# Altium PCB WX0.010.779PCB.pcbdoc
Units mm, origin at the board's own origin, x right, y up, seen from the top; angles counter-clockwise.
Board outline 126.8 x 104.81 mm, 2 copper layers (Top Layer, Bottom Layer); 13 components, 125 nets, 43 pads, 73 vias.
Unrouted connection lines stored in the file: 69.
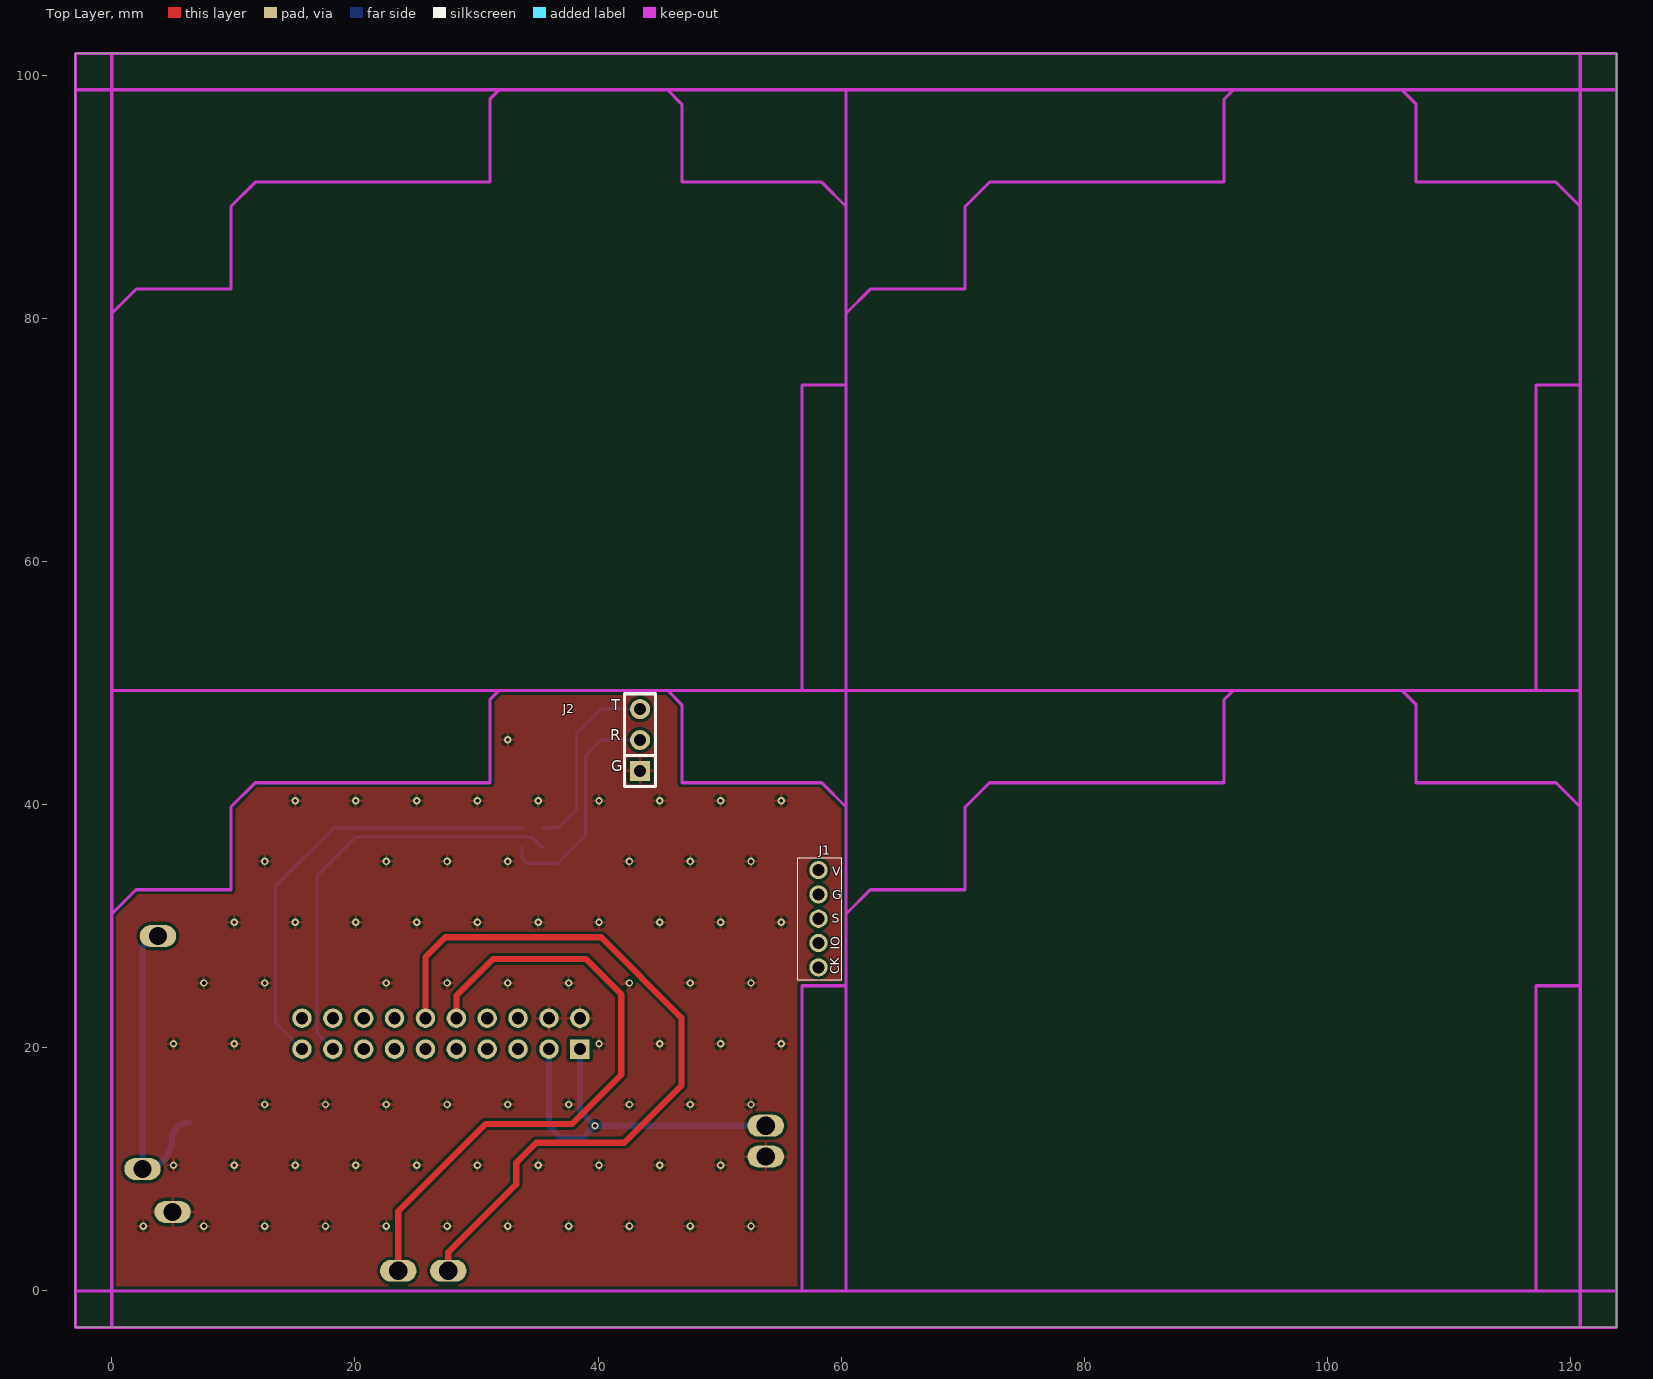
[diagram p0: Top Layer view]
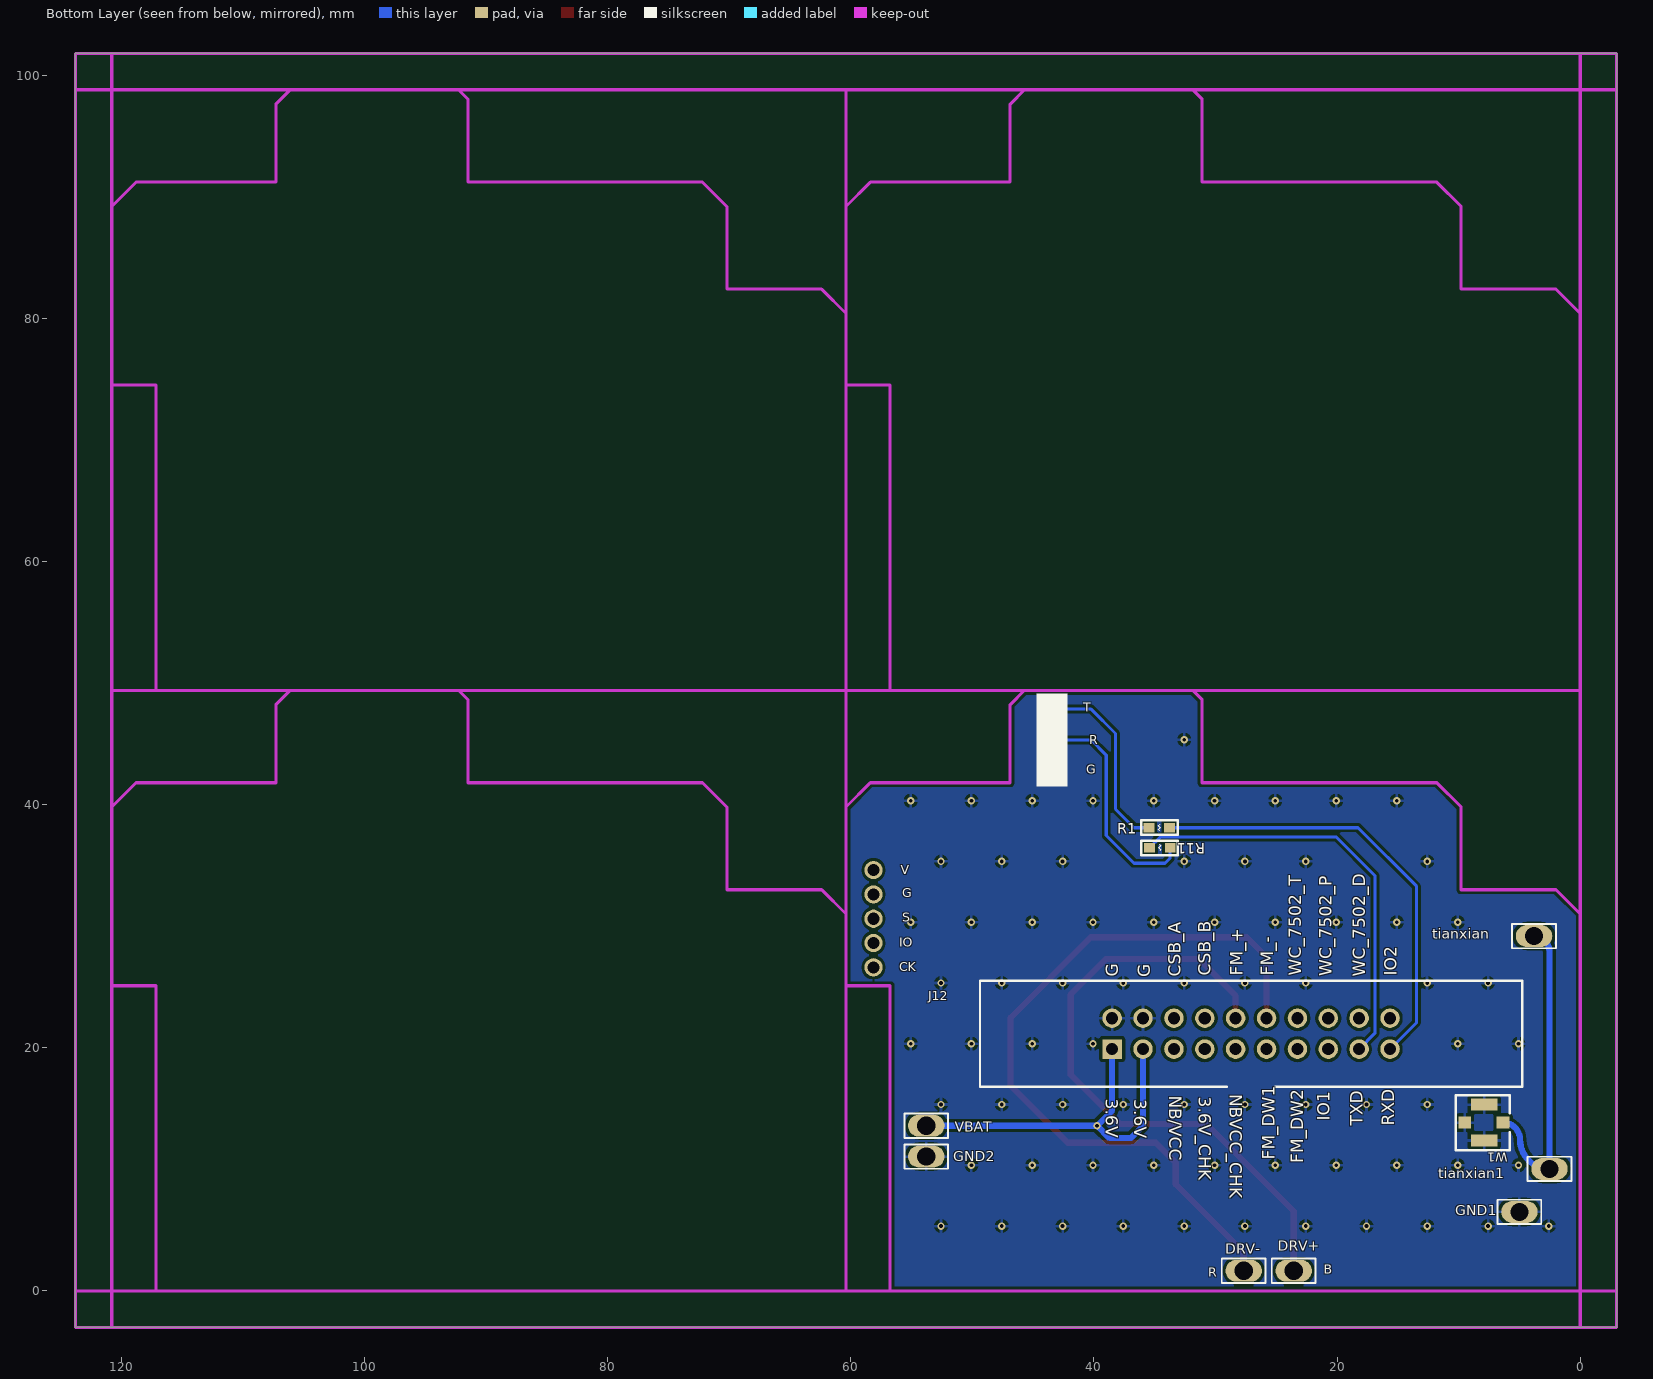
[diagram p1: Bottom Layer view, seen from below]

## Layer stack, top to bottom
Top Solder: solder mask 0.0102, Solder Resist, Dk 3.5
Top Layer: signal copper 0.0356
Dielectric 1: dielectric 0.32, FR-4, Dk 4.8
Bottom Layer: signal copper 0.0356
Bottom Solder: solder mask 0.0102, Solder Resist, Dk 3.5

## Board outline
-3,-3 123.8,-3 123.8,101.806 -3,101.806

## Design rules (kind name [scope] priority, off if disabled: settings)
Clearance [All] p1: gap=0.254 ignorepadtopadclearanceinfootprint=FALSE except(0: Arc-Hole Track-Hole SMDPad-Hole THPad-Hole Via-Hole Fill-Hole Poly-Hole Region-Hole Text-Hole)
PolygonConnect [All] p1: connectstyle=Relief reliefconductorwidth=0.254 reliefentries=4 polygonreliefangle="90 Angle" airgapwidth=0.254
RoutingVias [All] p1: holewidth=0.711 width=1.27 viastyle="Through Hole" minholewidth=0.711 minwidth=1.27 maxholewidth=0.711 maxwidth=1.27
SilkToSilkClearance [All] p1: silktosilkclearance=0
SilkToSolderMaskClearance [IsPad] p1 off: minsilkscreentomaskgap=0.254 clearancetoexposedcopper=TRUE
SolderMaskExpansion [All] p1: expansion=0.102
Width [All] p1: maxlimit=0.508 minlimit=0.254 preferedwidth=0.254 minimp=50.000000 maximp=50.000000 favimp=50.000000
28 further rules are at their usual default settings.

## Components (designator, comment, footprint, x,y, rotation, side; value= is the part's Value field where it differs from the comment)
DRV+ "Test Point" TP5 23.571,1.651 r270 bottom (schematic designator TP1)
DRV- "Test Point" TP5 27.686,1.651 r270 bottom (schematic designator TP1)
GND1 "Test Point" TP5 5.004,6.496 r270 bottom (schematic designator TP1)
GND2 "Test Point" TP5 53.797,11.049 r90 bottom (schematic designator TP1)
J1 "CON5-2.0" J_DIP_2.0_1*05_H 58.141,34.614 r270 top
J2 "CON3" SIP-3 43.459,42.774 r90 top
J12 "DC254_2*10" DC254_2*10 27.076,21.158 r90 bottom (schematic designator J2)
R1 "100R 5%" RES0603 33.782,38.1 r0 bottom (schematic designator R104)
R11 "100R 5%" RES0603 35.433,36.449 r180 bottom (schematic designator R104)
tianxian "Test Point" TP5 3.801,29.186 r270 bottom (schematic designator TP1)
tianxian1 "Test Point" TP5 2.527,10.033 r270 bottom (schematic designator TP1)
VBAT "Test Point" TP5 53.797,13.589 r90 bottom (schematic designator TP1)
W1 "天线" ANT-IPEX 6.35,13.843 r90 bottom

## Footprints (in the part's own frame and the unit in brackets; to place one, negate y for a bottom-side part, rotate by r counter-clockwise, add the part's x,y. Pads: shape width x height; smd on the part's side, far side on the other; paste and mask are expansions set on the pad)
ANT-IPEX [mm] "IPX天线座"
  rect 1x1.05 smd: 1(0,0)
  rect 1x2.2 smd: 2(-1.475,1.55) 2(1.475,1.55)
  rect 1x1 smd: 2(0,3.151)
  silkscreen extent -2.26,-0.56 2.26,3.9
DC254_2*10 [mm]
  rect 1.6x1.6 hole 1: 1(-1.27,11.43)
  round 1.6 hole 1: 2(1.27,11.43) 3(-1.27,8.89) 4(1.27,8.89) 5(-1.27,6.35) 6(1.27,6.35) 7(-1.27,3.81) 8(1.27,3.81) 9(-1.27,1.27) 10(1.27,1.27) 11(-1.27,-1.27) 12(1.27,-1.27) 13(-1.27,-3.81) 14(1.27,-3.81) 15(-1.27,-6.35) 16(1.27,-6.35) 17(-1.27,-8.89) 18(1.27,-8.89) 19(-1.27,-11.43) 20(1.27,-11.43)
  silkscreen extent -4.35,-22.3 4.35,22.3
J_DIP_2.0_1*05_H [mm]
  round 1.5 hole 1: 1(0,0) 2(2,0) 3(4,0) 4(6,0) 5(8,0)
  silkscreen extent -1.02,-1.7 9.02,1.91
RES0603 [mil]
  rect 35x31 smd: 1(0,0) 2(67,0)
  silkscreen extent -26,-24 92,23, body extent 0,-15 71,15, height 12
SIP-3 [mil]
  rect 65x65 hole 39.37: 1(0,0)
  round 65 hole 39.37: 2(100,0) 3(200,0)
  silkscreen extent -50,-50 250,50
TP5 [mm]
  oval 1.8x3 hole 1.5: 1(0,0)
  silkscreen extent -1,-1.8 1,1.8

## Part data
DRV+ DRV- GND1 GND2 tianxian tianxian1 VBAT: library part "Test Point  PASS", "测试点"
J1: library part 15, "焊接插座,间距2.0mm"
J2: library part 2, "焊接插座,间距2.54mm"
J12: library part 1010902-0139, "DC2 2.54mm 2x10pin,2.54mm间距，2x10pin，32×8.55×27.5mm,母头,双排,双排"
R1 R11: library part 101010103-0022, "100R,±5%,1/10W,0603,国巨,RC0603JR-07100RL"
W1: library part 1010902-0145, "UB06000058A,3*3.1*1.25mm,公头,单排,IPEX一代板端"

## Via types
v1: diameter 0.61, hole 0.305, Top Layer to Bottom Layer, tented both sides, 72 vias
v2: diameter 0.6, hole 0.3, Top Layer to Bottom Layer, tented both sides, 1 vias

## Nets (pads, with @x,y where several pads share a name; then routed paths per layer and width w, separated by ;. In a path a pad name is that pad's centre, name@x,y a point inside that pad or via, vN(x,y) a via of type N, cw(c..) or ccw(c..) an arc to the next point about the centre after c; other vN are vias at no path point)
AIN8: 
AIN9: 
ANT: 
CLOSE: 
CTR_F_VCC: 
DB_RXD: J2.2 R11.2 | length 18.8
  Bottom Layer w0.254: R11.2 33.731,35.611 34.163,35.179 36.703,35.179 38.989,37.465 38.989,44.069 40.234,45.314 J2.2
DB_TXD: J2.3 R1.2 | length 15.7
  Bottom Layer w0.254: R1.2 36.703,38.1 38.227,39.624 38.227,45.847 40.234,47.854 J2.3
DRV+: DRV+.1 J12.10 | length 52.4
  Top Layer w0.508: DRV+.1 23.571,6.553 30.734,13.716 37.846,13.716 41.91,17.78 41.91,24.384 38.989,27.305 31.369,27.305 28.346,24.282 J12.10
DRV-: DRV-.1 J12.12 | length 62.5
  Top Layer w0.508: J12.12 25.806,27.457 27.432,29.083 40.259,29.083 46.863,22.479 46.863,16.891 42.164,12.192 34.925,12.192 33.274,10.541 33.274,8.763 27.686,3.175 DRV-.1
EXTI1: 
EXTI2: 
EXTI3: 
EXTI4: 
FLASH_CLK: 
FLASH_CS: 
FLASH_MISO: 
FLASH_MOSI: 
FLASH_VCC: 
FLASH_WP: 
GND: GND1.1 GND2.1 J2.1 J12.2 J12.4 W1.2
  other v1: 2.582,5.329 7.582,5.329 12.582,5.329 17.582,5.329 22.582,5.329 27.582,5.329 32.582,5.329 37.582,5.329 42.582,5.329 47.582,5.329 52.582,5.329 5.082,10.329 10.082,10.329 15.082,10.329 20.082,10.329 25.082,10.329 30.082,10.329 35.082,10.329 40.082,10.329 45.082,10.329 50.082,10.329 12.582,15.329 17.582,15.329 22.582,15.329 27.582,15.329 32.582,15.329 37.582,15.329 42.582,15.329 47.582,15.329 52.582,15.329 5.082,20.329 10.082,20.329 40.082,20.329 45.082,20.329 50.082,20.329 55.082,20.329 7.582,25.329 12.582,25.329 22.582,25.329 27.582,25.329 32.582,25.329 37.582,25.329 42.582,25.329 47.582,25.329 52.582,25.329 10.082,30.329 15.082,30.329 20.082,30.329 25.082,30.329 30.082,30.329 35.082,30.329 40.082,30.329 45.082,30.329 50.082,30.329 55.082,30.329 12.582,35.329 22.582,35.329 27.582,35.329 32.582,35.329 42.582,35.329 47.582,35.329 52.582,35.329 15.082,40.329 20.082,40.329 25.082,40.329 30.082,40.329 35.082,40.329 40.082,40.329 45.082,40.329 50.082,40.329 55.082,40.329 32.582,45.329
IR_EN: 
IR_PWM: 
IR_RX: 
IR_TX: 
KEY: 
LED: 
LED0: 
LED1: 
NB_ON: 
NB_RST: 
NB_RST_MCU: 
NB_RX: 
NB_RX_MCU: 
NB_TX: 
NB_TX_MCU: 
NetC2_2: 
NetC4_2: 
NetC5_2: 
NetC6_1: 
NetC6_2: 
NetC7_1: 
NetC8_2: 
NetC14_2: 
NetC16_2: 
NetC17_1: 
NetC18_2: 
NetC23_2: 
NetC24_1: 
NetC33_2: 
NetD1_2: 
NetD3_1: 
NetD3_2: 
NetD4_1: 
NetD4_2: 
NetD5_1: 
NetD6_2: 
NetE1_1: tianxian1.1 tianxian.1 W1.1 | length 25.9
  Bottom Layer w0.508: tianxian1.1 tianxian1.1@2.54,10.033 ; tianxian.1 ccw(c3.801,27.924) 2.54,27.924 tianxian1.1@2.54,10.033 ; W1.1 ccw(c6.35,12.446) 4.953,12.446 cw(c2.54,12.446) tianxian1.1@2.54,10.033
NetE2_1: 
NetE3_1: 
NetJ1_3: J1.3
NetJ3_2: 
NetJ3_3: 
NetJ3_4: 
NetJ4_4: 
NetJ4_5: 
NetJ5_2: 
NetJ5_3: 
NetJ5_4: 
NetKT1_1: 
NetQ1_1: 
NetQ2_1: 
NetQ2_3: 
NetQ3_1: 
NetQ4_1: 
NetQ4_3: 
NetQ5_1: 
NetQ5_3: 
NetQ6_1: 
NetQ6_3: 
NetQ7_1: 
NetQ9_1: 
NetQ9_3: 
NetQ10_1: 
NetQ10_3: 
NetQ11_1: 
NetQ11_3: 
NetQ12_1: 
NetQ12_3: 
NetQ13_1: 
NetR3_2: 
NetR4_2: 
NetR5_2: 
NetR6_2: 
NetR7_2: 
OPEN: 
OUT_A: 
OUT_B: 
OUT_EN: 
P_CH0: 
P_CH1: 
P_CH2: 
RESET: 
RXD: J12.19 R1.1 | length 36.6
  Bottom Layer w0.254: J12.19 13.462,22.073 13.462,33.274 18.288,38.1 R1.1
STATUS: 
SVS: 
SVS_EN: 
SWCLK: J1.5
SWDIO: J1.4
TXD: J12.17 R11.1 | length 35
  Bottom Layer w0.254: J12.17 16.891,21.184 16.891,34.163 20.053,37.325 34.557,37.325 R11.1
USIM_VDD: 
VBAT: J12.1 J12.3 VBAT.1 | length 31.8
  Bottom Layer w0.508: J12.3 35.966,13.564 36.957,12.573 38.735,12.573 v2(39.751,13.589) ; J12.1 38.506,14.834 v2(39.751,13.589) ; VBAT.1 v2(39.751,13.589)
VCC: J1.1
VCC-8837: 
VCC_M: 
VDCIA: 
VDCID: 
VDD_IO: 
VDD_IR: 
VDD_NB: 
VINTA: 
VSW: 
X32MI: 
X32MO: 
XT1: 
XT2: 
pads on no net: J1.2 J12.5 J12.6 J12.7 J12.8 J12.9 J12.11 J12.13 J12.14 J12.15 J12.16 J12.18 J12.20

## Polygon pours and split planes (outlines as drawn)
GND on Top Layer "Component Side-No Net" (solid, pour order 0): 0,0 56.769,0 56.769,25.1 60.4,25.1 60.4,39.8 58.4,41.8 46.9,41.8 46.9,48.223 45.72,49.403 31.877,49.403 31.1,48.626 31.1,41.8 11.8,41.8 9.8,39.8 9.8,33 2,33 0,31
GND on Bottom Layer "Component Side-No Net" (solid, pour order 2): 0,0 56.769,0 56.769,25.1 60.4,25.1 60.4,39.8 58.4,41.8 46.9,41.8 46.9,48.223 45.72,49.403 31.877,49.403 31.1,48.626 31.1,41.8 11.8,41.8 9.8,39.8 9.8,33 2,33 0,31

## Keep-outs
Keep-Out Layer:
  lines w0.254: -3,0 0,0 ; 0,-3 0,0 ; 120.8,-3 120.8,0 ; 120.8,101.806 120.8,98.806 ; 123.8,0 120.8,0 ; 123.8,98.806 120.8,98.806 ; -3,98.806 -3,-3 123.8,-3 123.8,101.806 0,101.806 ; -3,98.806 -3,101.806 0,101.806 ; -3,98.806 0,98.806 ; 0,0 0,7.912 0,31 ; 0,0 16.018,0 56.769,0 ; 0,31 0,49.403 ; 0,31 0,31 ; 0,31 2,33 ; 0,31 2,33 ; 0,49.403 16.018,49.403 56.769,49.403 ; 0,49.403 0,57.315 0,80.403 ; 0,49.403 31.877,49.403 ; 0,80.403 2,82.403 ; 0,80.403 2,82.403 ; 0,80.403 0,80.403 ; 0,80.403 0,98.806 ; 0,98.806 0,101.806 ; 0,98.806 31.877,98.806 ; 2,33 9.8,33 ; 2,33 9.8,33 ; 2,82.403 9.8,82.403 ; 2,82.403 9.8,82.403 ; 9.8,33 9.8,39.799 ; 9.8,33 9.8,39.799 ; 9.8,39.799 11.8,41.8 ; 9.8,39.799 11.8,41.8 ; 9.8,82.403 9.8,89.202 ; 9.8,82.403 9.8,89.202 ; 9.8,89.202 11.8,91.203 ; 9.8,89.202 11.8,91.203 ; 11.8,41.8 31.1,41.8 ; 11.8,41.8 31.1,41.8 ; 11.8,91.203 31.1,91.203 ; 11.8,91.203 31.1,91.203 ; 31.1,41.8 31.1,48.626 31.877,49.403 ; 31.1,91.203 31.1,98.029 31.877,98.806 ; 31.877,49.403 45.72,49.403 ; 31.877,98.806 45.72,98.806 ; 45.72,49.403 60.4,49.403 ; 45.72,49.403 46.9,48.223 46.9,41.8 ; 45.72,98.806 46.9,97.626 46.9,91.203 ; 45.72,98.806 60.4,98.806 ; 46.9,41.8 58.4,41.8 ; 46.9,41.8 58.4,41.8 ; 46.9,91.203 58.4,91.203 ; 46.9,91.203 58.4,91.203 ; 56.769,0 60.4,0 ; 56.769,0 56.769,25.1 ; 56.769,25.1 60.4,25.1 ; 56.769,25.1 60.4,25.1 ; 56.769,49.403 56.769,74.503 ; 56.769,49.403 60.4,49.403 ; 56.769,74.503 60.4,74.503 ; 56.769,74.503 60.4,74.503 ; 58.4,41.8 60.4,39.8 ; 58.4,41.8 60.4,39.8 ; 58.4,91.203 60.4,89.203 ; 58.4,91.203 60.4,89.203 ; 60.4,0 76.418,0 117.169,0 ; 60.4,0 60.4,7.912 60.4,31 ; 60.4,0 60.4,25.1 ; 60.4,25.1 60.4,39.8 ; 60.4,25.1 60.4,39.8 ; 60.4,31 62.4,33 ; 60.4,31 62.4,33 ; 60.4,31 60.4,31 ; 60.4,31 60.4,49.403 ; 60.4,39.8 60.4,49.403 ; 60.4,49.403 76.418,49.403 117.169,49.403 ; 60.4,49.403 60.4,57.315 60.4,80.403 ; 60.4,49.403 60.4,74.503 ; 60.4,49.403 92.277,49.403 ; 60.4,74.503 60.4,89.203 ; 60.4,74.503 60.4,89.203 ; 60.4,80.403 62.4,82.403 ; 60.4,80.403 62.4,82.403 ; 60.4,80.403 60.4,80.403 ; 60.4,80.403 60.4,98.806 ; 60.4,89.203 60.4,98.806 ; 60.4,98.806 92.277,98.806 ; 62.4,33 70.2,33 ; 62.4,33 70.2,33 ; 62.4,82.403 70.2,82.403 ; 62.4,82.403 70.2,82.403 ; 70.2,33 70.2,39.799 ; 70.2,33 70.2,39.799 ; 70.2,39.799 72.2,41.8 ; 70.2,39.799 72.2,41.8 ; 70.2,82.403 70.2,89.202 ; 70.2,82.403 70.2,89.202 ; 70.2,89.202 72.2,91.203 ; 70.2,89.202 72.2,91.203 ; 72.2,41.8 91.5,41.8 ; 72.2,41.8 91.5,41.8 ; 72.2,91.203 91.5,91.203 ; 72.2,91.203 91.5,91.203 ; 91.5,41.8 91.5,48.626 92.277,49.403 ; 91.5,91.203 91.5,98.029 92.277,98.806 ; 92.277,49.403 106.12,49.403 ; 92.277,98.806 106.12,98.806 ; 106.12,49.403 107.3,48.223 107.3,41.8 ; 106.12,49.403 120.8,49.403 ; 106.12,98.806 107.3,97.626 107.3,91.203 ; 106.12,98.806 120.8,98.806 ; 107.3,41.8 118.8,41.8 ; 107.3,41.8 118.8,41.8 ; 107.3,91.203 118.8,91.203 ; 107.3,91.203 118.8,91.203 ; 117.169,0 117.169,25.1 ; 117.169,0 120.8,0 ; 117.169,25.1 120.8,25.1 ; 117.169,25.1 120.8,25.1 ; 117.169,49.403 117.169,74.503 ; 117.169,49.403 120.8,49.403 ; 117.169,74.503 120.8,74.503 ; 117.169,74.503 120.8,74.503 ; 118.8,41.8 120.8,39.8 ; 118.8,41.8 120.8,39.8 ; 118.8,91.203 120.8,89.203 ; 118.8,91.203 120.8,89.203 ; 120.8,0 120.8,25.1 ; 120.8,25.1 120.8,39.8 ; 120.8,25.1 120.8,39.8 ; 120.8,39.8 120.8,49.403 ; 120.8,49.403 120.8,74.503 ; 120.8,74.503 120.8,89.203 ; 120.8,74.503 120.8,89.203 ; 120.8,89.203 120.8,98.806

## Silkscreen, mask and mechanical layers (free items; w line width, h text height)
Top Overlay:
  text "T" at 41.072,47.447 h1.52
  text "R" at 41.021,44.958 h1.52
  text "G" at 41.072,42.418 h1.52
  text "V" at 59.284,34.138 h0.76
  text "G" at 59.258,32.207 h0.76
  text "S" at 59.233,30.302 h0.76
  text "IO" at 59.868,28.042 h0.76 r90
  text "CK" at 59.842,26.035 h0.76 r90
Bottom Overlay:
  text "T" at 40.894,47.625 h0.76
  text "R" at 40.386,44.958 h0.76
  text "G" at 40.64,42.545 h0.76
  text "V" at 55.88,34.29 h0.76
  text "G" at 55.753,32.385 h0.76
  text "S" at 55.753,30.353 h0.76
  text "IO" at 56.007,28.321 h0.76
  text "CK" at 56.007,26.289 h0.76
  text "FM_-" at 25.273,25.933 h1.02 r270
  text "IO2" at 15.113,25.908 h1.02 r270
  text "WC_7502_T" at 22.962,25.908 h1.02 r270
  text "FM_+" at 27.762,25.908 h1.02 r270
  text "CSB_B" at 30.378,25.908 h1.02 r270
  text "WC_7502_P" at 20.447,25.883 h1.02 r270
  text "G" at 37.998,25.857 h1.02 r270
  text "WC_7502_D" at 17.678,25.832 h1.02 r270
  text "CSB_A" at 32.868,25.832 h1.02 r270
  text "G" at 35.357,25.806 h1.02 r270
  text "NBVCC_CHK" at 28.829,16.18 h1.02 r90
  text "NB/VCC" at 33.807,16.053 h1.02 r90
  text "3.6V_CHK" at 31.394,15.951 h1.02 r90
  text "3.6V" at 39.014,15.799 h1.02 r90
  text "3.6V" at 36.703,15.773 h1.02 r90
  text "IO1" at 20.599,13.995 h1.02 r270
  text "RXD" at 15.291,13.589 h1.02 r270
  text "TXD" at 17.882,13.589 h1.02 r270
  text "FM_DW1" at 25.146,10.77 h1.02 r270
  text "FM_DW2" at 22.784,10.49 h1.02 r270
  text "B" at 21.082,1.397 h0.76
  text "R" at 30.607,1.143 h0.76